# Altium PCB PCB1.PcbDoc
Units mil, origin at the board's own origin, x right, y up, seen from the top; angles counter-clockwise.
Board outline 1595.01 x 1575 mil, 2 copper layers (Top Layer, Bottom Layer); 13 components, 8 nets, 31 pads, 0 vias.
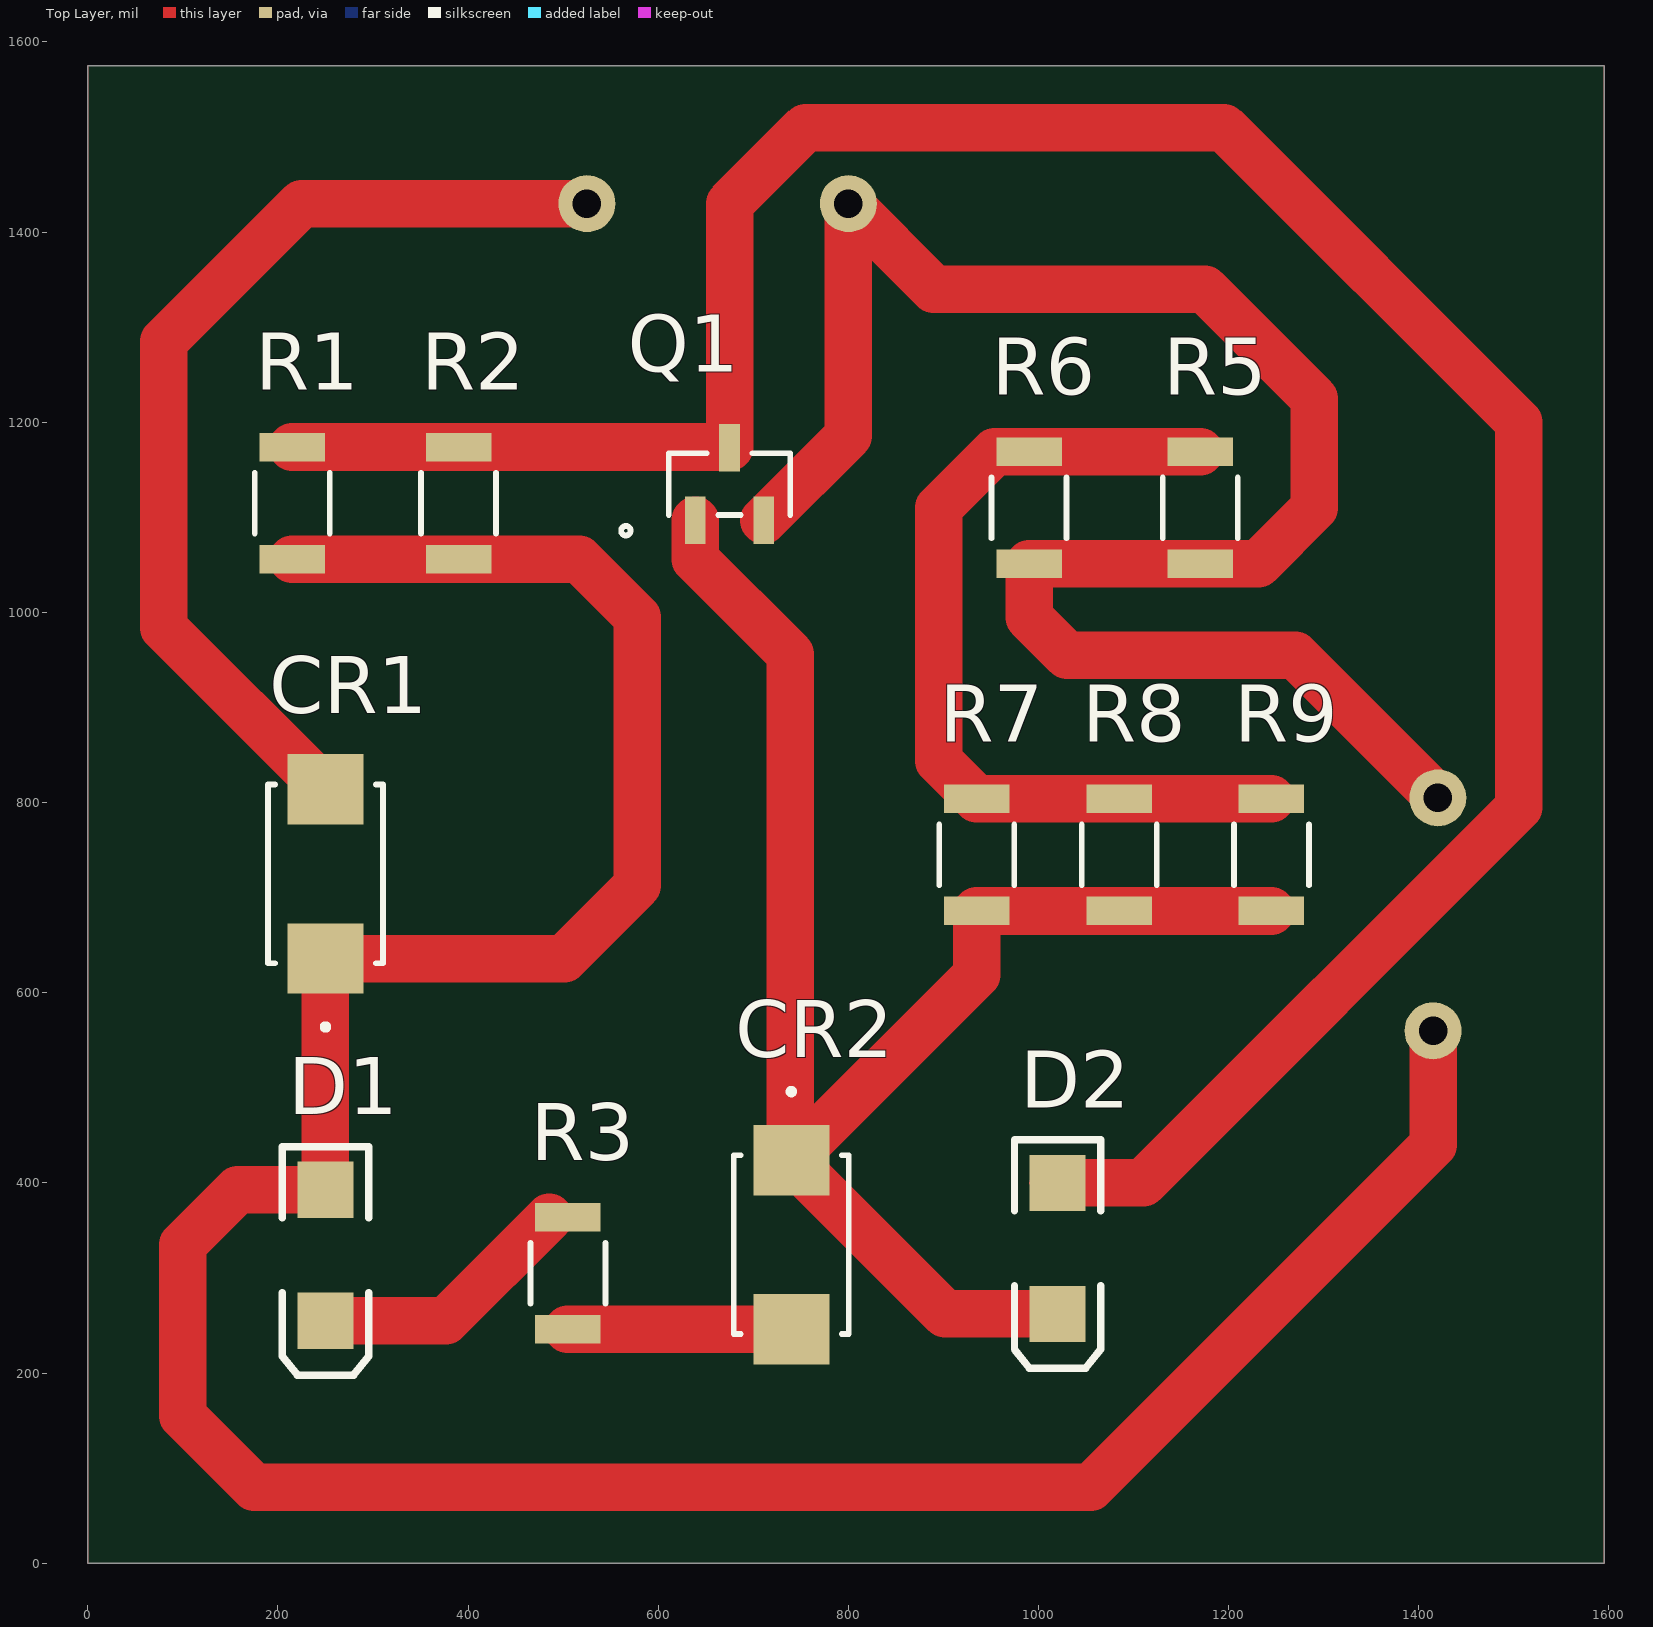
[diagram p0: Top Layer view]
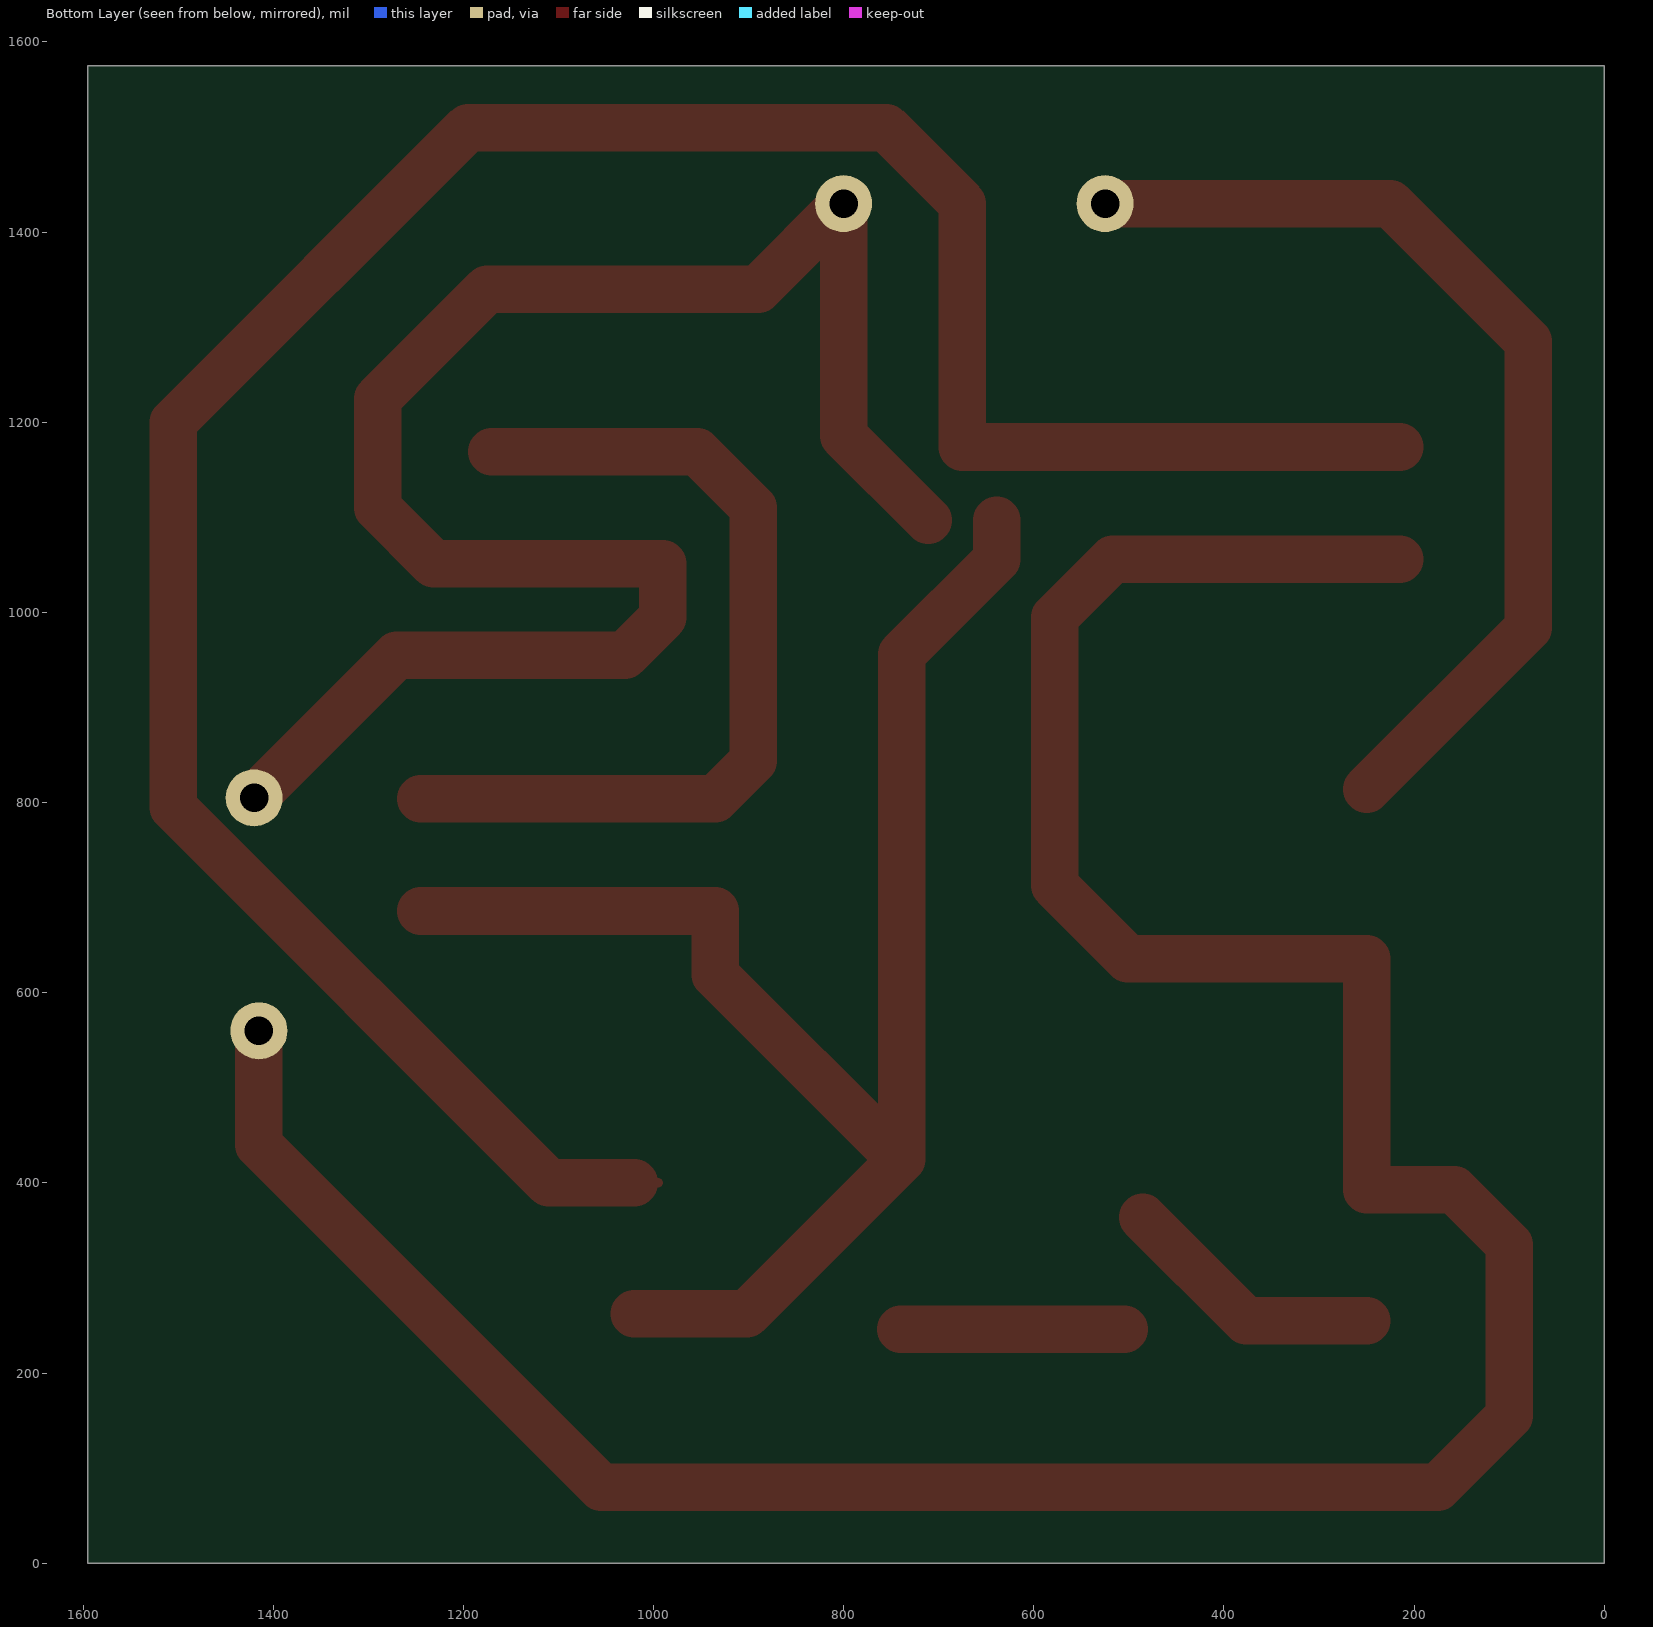
[diagram p1: Bottom Layer view, seen from below]
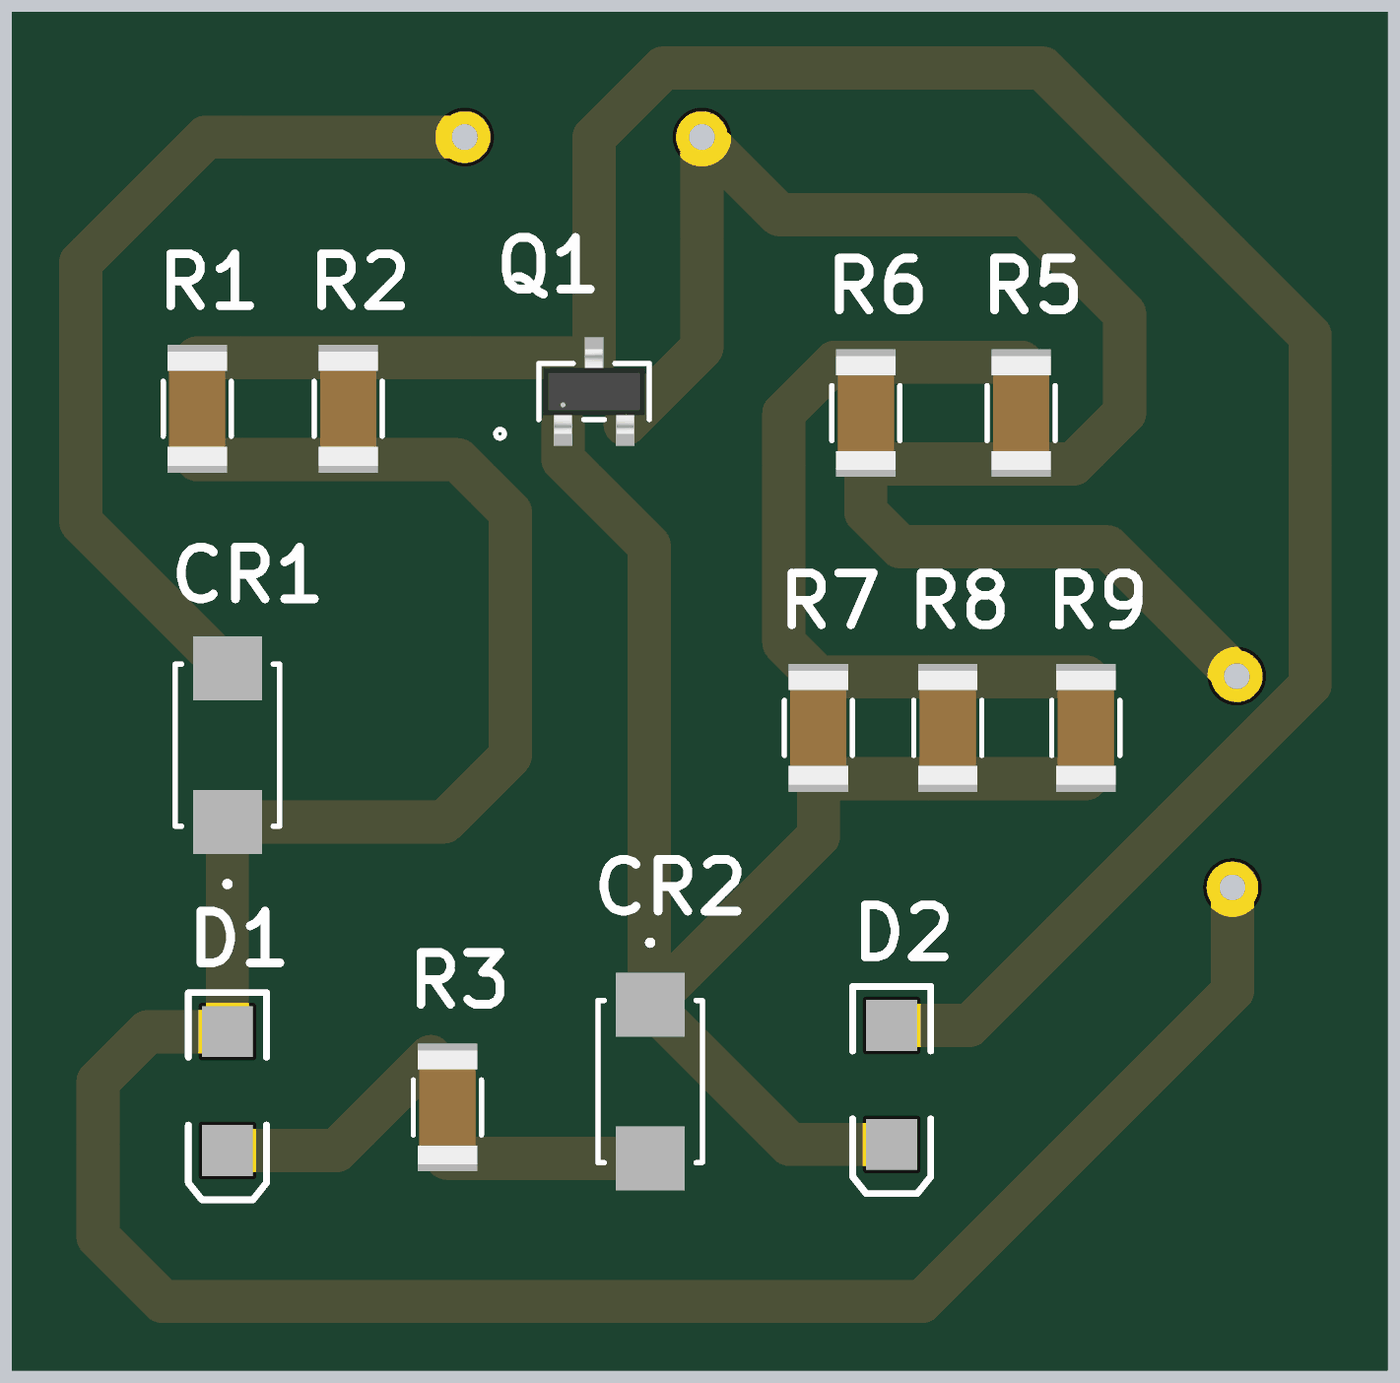
[diagram p2: 3D render of the assembled board from above, using the file's embedded part models]

## Layer stack, top to bottom
Top Solder: solder mask 0.4, Solder Resist, Dk 3.5
Top Layer: signal copper 1.4
Dielectric 1: dielectric 12.6, FR-4, Dk 4.8
Bottom Layer: signal copper 1.4
Bottom Solder: solder mask 0.4, Solder Resist, Dk 3.5

## Board outline
-0.01,0 0.01,1575 1595,1575 1595,0

## Design rules (kind name [scope] priority, off if disabled: settings)
Clearance [All] p1: gap=10 ignorepadtopadclearanceinfootprint=FALSE except(0: Arc-Hole Track-Hole SMDPad-Hole THPad-Hole Via-Hole Fill-Hole Poly-Hole Region-Hole Text-Hole)
PolygonConnect [All] p1: connectstyle=Relief reliefconductorwidth=10 reliefentries=4 polygonreliefangle="90 Angle" airgapwidth=10
RoutingVias [All] p1: holewidth=28 width=50 viastyle="Through Hole" minholewidth=28 minwidth=50 maxholewidth=28 maxwidth=50
SolderMaskExpansion [All] p1: expansion=4 istentingtop=FALSE
Width [All] p1: maxlimit=10 minlimit=10 preferedwidth=10
30 further rules are at their usual default settings.

## Components (designator, comment, footprint, x,y, rotation, side; value= is the part's Value field where it differs from the comment)
CR1 "1N4007(M7)" CR_1N4007(M7)_YTS 250,725 r90 top
CR2 "1N4007(M7)" CR_1N4007(M7)_YTS 740,335 r270 top
D1 "LED2" 3.2X1.6X1.1 250,323.9 r270 top
D2 "LED2" 3.2X1.6X1.1 1020,331.1 r270 top
Q1 "DDTC123ECA-7-F" SOT23_DIO 675,1135 r0 top
R1 "ESR18EZPJ431" RES_R1206_ROM 215,1115 r90 top
R2 "ESR18EZPJ431" RES_R1206_ROM 390,1115 r90 top
R3 "ESR18EZPJ431" RES_R1206_ROM 505,305 r270 top
R5 "ESR18EZPJ431" RES_R1206_ROM 1170,1110 r270 top
R6 "ESR18EZPJ431" RES_R1206_ROM 990,1110 r270 top
R7 "ESR18EZPJ431" RES_R1206_ROM 935,745 r90 top
R8 "ESR18EZPJ431" RES_R1206_ROM 1085,745 r90 top
R9 "ESR18EZPJ431" RES_R1206_ROM 1245,745 r90 top

## Footprints (in the part's own frame and the unit in brackets; to place one, negate y for a bottom-side part, rotate by r counter-clockwise, add the part's x,y. Pads: shape width x height; smd on the part's side, far side on the other; paste and mask are expansions set on the pad)
3.2X1.6X1.1 [mm] "SMT LED; 2 Flat Leads"
  rect 1.5x1.5 smd: 1(-1.75,0) 2(1.75,0)
  silkscreen extent -2.9,-1.15 3.2,1.15
CR_1N4007(M7)_YTS [mil]
  rect 74x80 smd paste+0 mask+0: 1(-89,0) 2(89,0)
  silkscreen extent -164,-61 94,61, body extent 0,0 10,10, height 10
RES_R1206_ROM [mil]
  rect 30x68.9 smd paste+0 mask+0: 1(-59,0) 2(59,0)
  silkscreen extent -32,-39 32,39, body extent -66,-34 66,34, height 26
SOT23_DIO [mil]
  rect 22x50 smd paste+0 mask+0: 1(-36.02,-38) 2(36.02,-38) 3(0,38)
  silkscreen extent -114,-54 64,32, body extent -59,-49 59,49, height 41

## Part data
CR1 CR2: "No Description Available", Mfr_Name="UMW(Youtai Semiconductor Co., Ltd.)", Copyright="Copyright (C) 2022 Ultra Librarian. All rights reserved.", Manufacturer_Part_Number=1N4007(M7), RefDes=RefDes, Type=DEV
D1 D2: "Typical RED, GREEN, YELLOW, AMBER GaAs LED", LatestRevisionDate=17-Jul-2002, LatestRevisionNote="Re-released for DXP Platform.", PackageDescription="SM LED; 2 Flat Leads", PackageReference=3.2X1.6X1.1, PackageVersion=Feb-2002, Published=8-Jun-2000, Publisher="Altium Limited"
Q1: "No Description Available", Mfr_Name="Diodes Inc", Copyright="Copyright (C) 2022 Ultra Librarian. All rights reserved.", Manufacturer_Part_Number=DDTC123ECA-7-F, RefDes=RefDes, Type=DEV
R1 R2 R3 R5 R6 R7 R8 R9: "No Description Available", Mfr_Name="ROHM Semiconductor", Copyright="Copyright (C) 2022 Ultra Librarian. All rights reserved.", Manufacturer_Part_Number=ESR18EZPJ431, RefDes=RefDes, Type=DEV

## Free pads (board coordinates)
  round 60 hole 30: 1(1415,560) 2(1420,805) 3(800,1430) 4(525,1430)

## Nets (pads, with @x,y where several pads share a name; then routed paths per layer and width w, separated by ;. In a path a pad name is that pad's centre, name@x,y a point inside that pad or via, vN(x,y) a via of type N, cw(c..) or ccw(c..) an arc to the next point about the centre after c; other vN are vias at no path point)
3V: CR1.1 D1.1 pad.1 R1.1 R2.1 | length 3242.5
  Top Layer w10: 1410.37,435.37 1415,440
  Top Layer w50: R1.1 R2.1 517,1056 578,995 578,712.94 501.06,636 CR1.1 D1.1 157.8,392.8 100,335 100,155 175,80 1055,80 1410.37,435.37 ; 1415,440 pad.1
5V: CR1.2 pad.4 | length 1066.3
  Top Layer w10: CR1.2@236,800 CR1.2
  Top Layer w50: CR1.2 80,984 80,1285 225,1430 pad.4
GND: pad.2 pad.3 Q1.2 R5.2 R6.2 | length 1948.9
  Top Layer w50: Q1.2 800,1185.98 pad.3 890,1340 1175,1340 1290,1225 1290,1110 1231,1051 R5.2 R6.2 990,995 1030,955 1270,955 pad.2
NetCR2_1: CR2.1 D2.2 Q1.1 R7.1 R8.1 R9.1 | length 1714.6
  Top Layer w10: CR2.1@739,425 CR2.1
  Top Layer w50: Q1.1 638.98,1056.02 739,956 CR2.1@739,425 ; D2.2 901.8,262.2 CR2.1 935,619 R7.1 R8.1 R9.1
NetCR2_2: CR2.2 R3.2 | length 235
  Top Layer w50: R3.2 CR2.2
NetD1_2: D1.2 R3.1 | length 300.1
  Top Layer w10: R3.1@485.55,364 R3.1
  Top Layer w50: D1.2 376.55,255 R3.1@485.55,364
NetD2_1: D2.1 Q1.3 R1.2 R2.2 | length 2787.2
  Top Layer w10: Q1.3 Q1.3@675,1174 ; D2.1@995,400 D2.1
  Top Layer w50: R1.2 R2.2 675,1174 675,1430 755,1510 1195,1510 1505,1200 1505,795 1110,400 D2.1
NetR5_1: R5.1 R6.1 R7.2 R8.2 R9.2 | length 932
  Top Layer w50: R5.1 954,1169 895,1110 895,844 R7.2 R8.2 R9.2

## Polygon pours and split planes (outlines as drawn)
GND on Top Layer "GND_L01_P000" (solid, pour order 0): 0,1575 0,0 1595,0 1595,1575